# Altium PCB dc_cdi_pcb.PcbDoc (part 1 of 2)
Units mm, origin at the board's own origin, x right, y up, seen from the top; angles counter-clockwise.
Board outline 102.36 x 169.29 mm, 4 copper layers (Signal Top, Ground, Vcc, Signal Bottom), stack 0.603 mm thick; 125 components, 82 nets, 511 pads, 71 vias.
Unrouted connection lines stored in the file: 139.
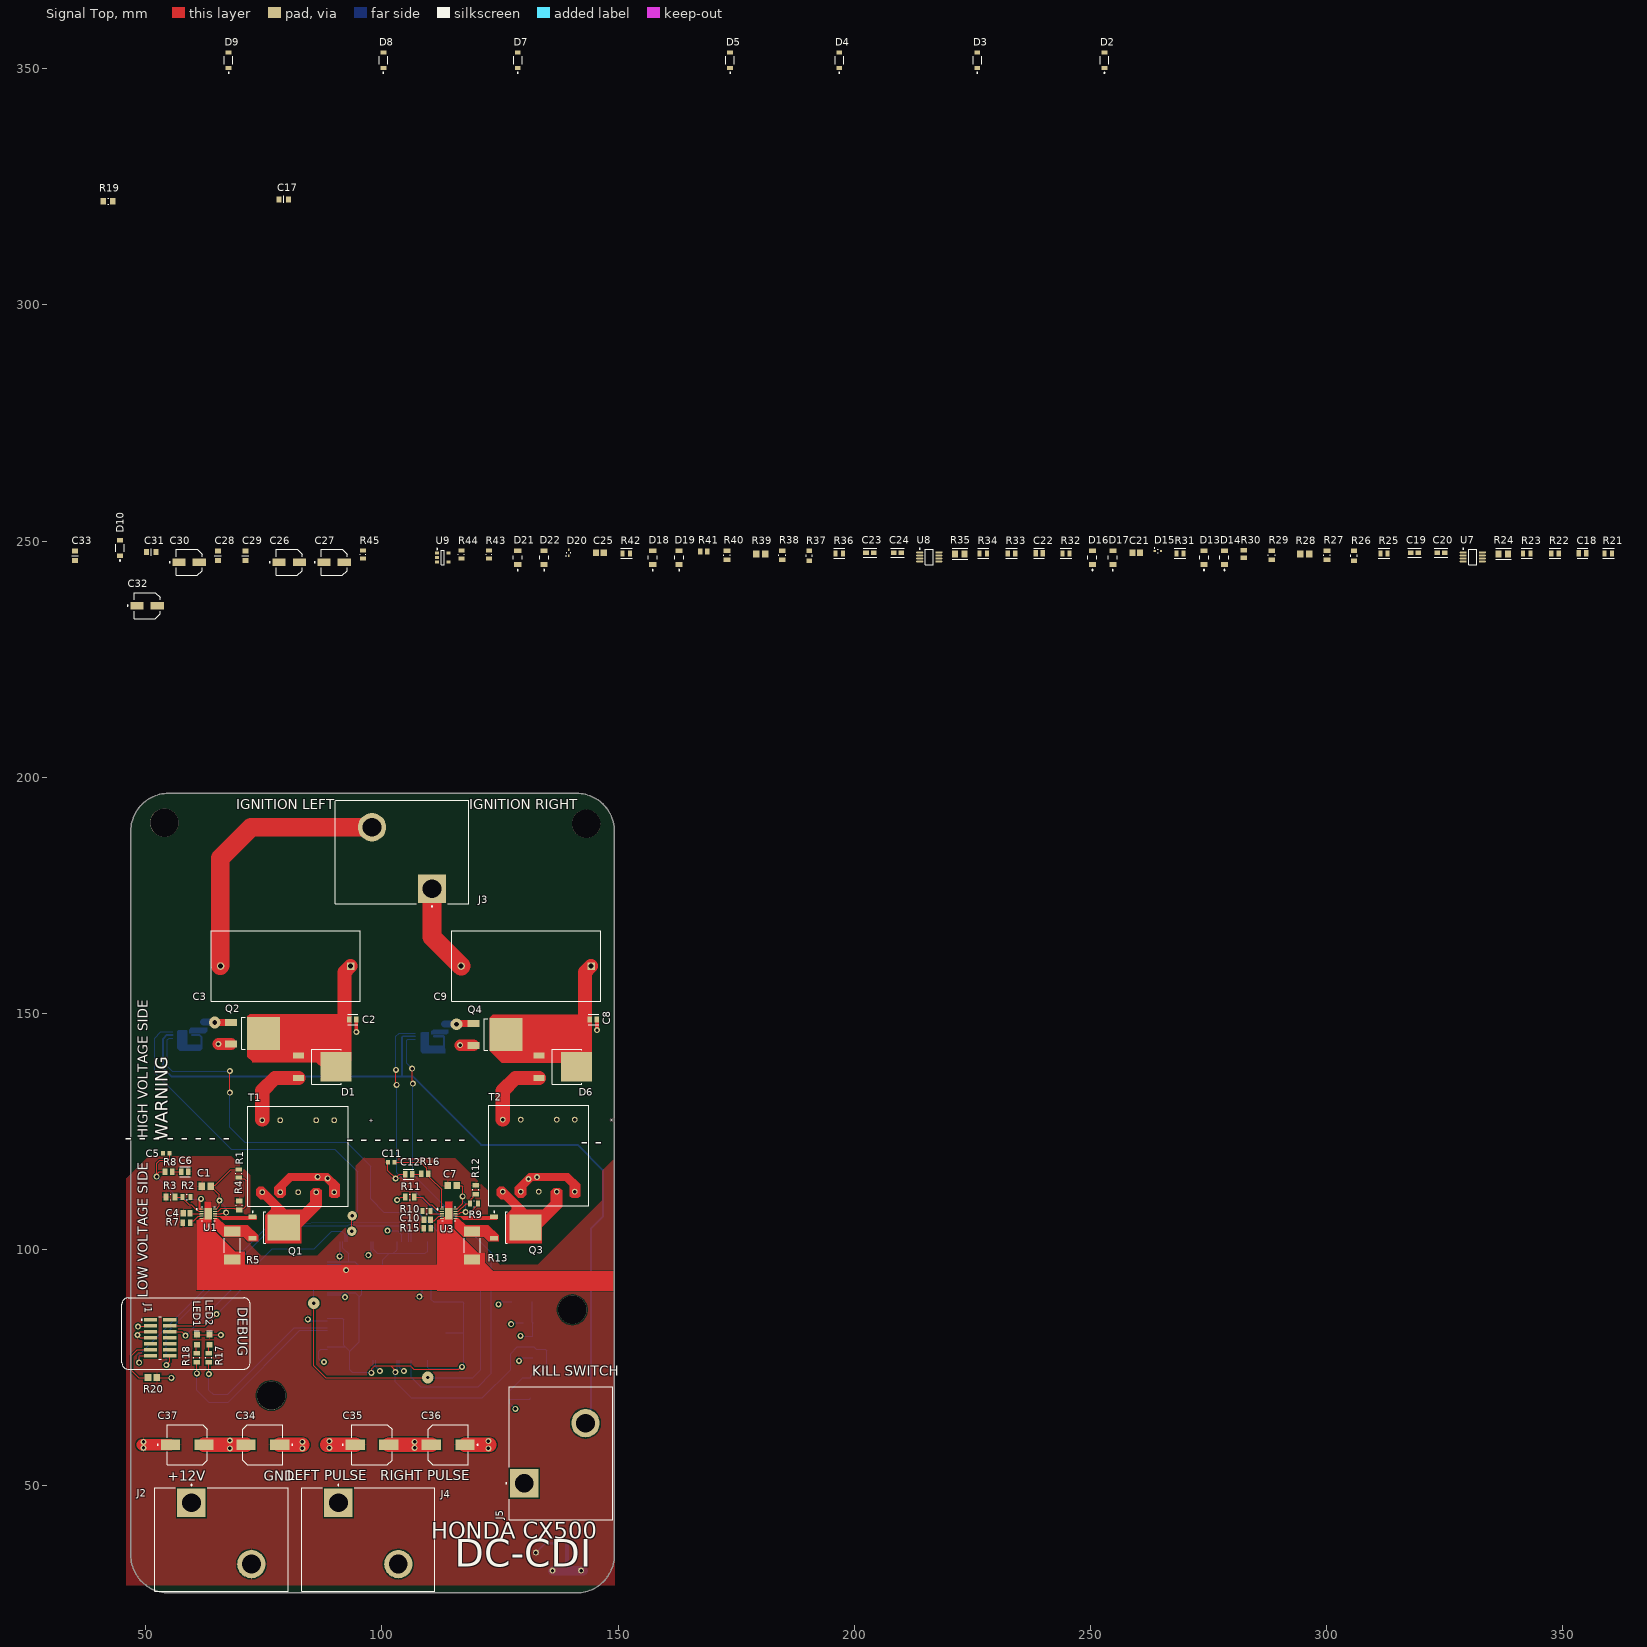
[diagram p0: Signal Top view]
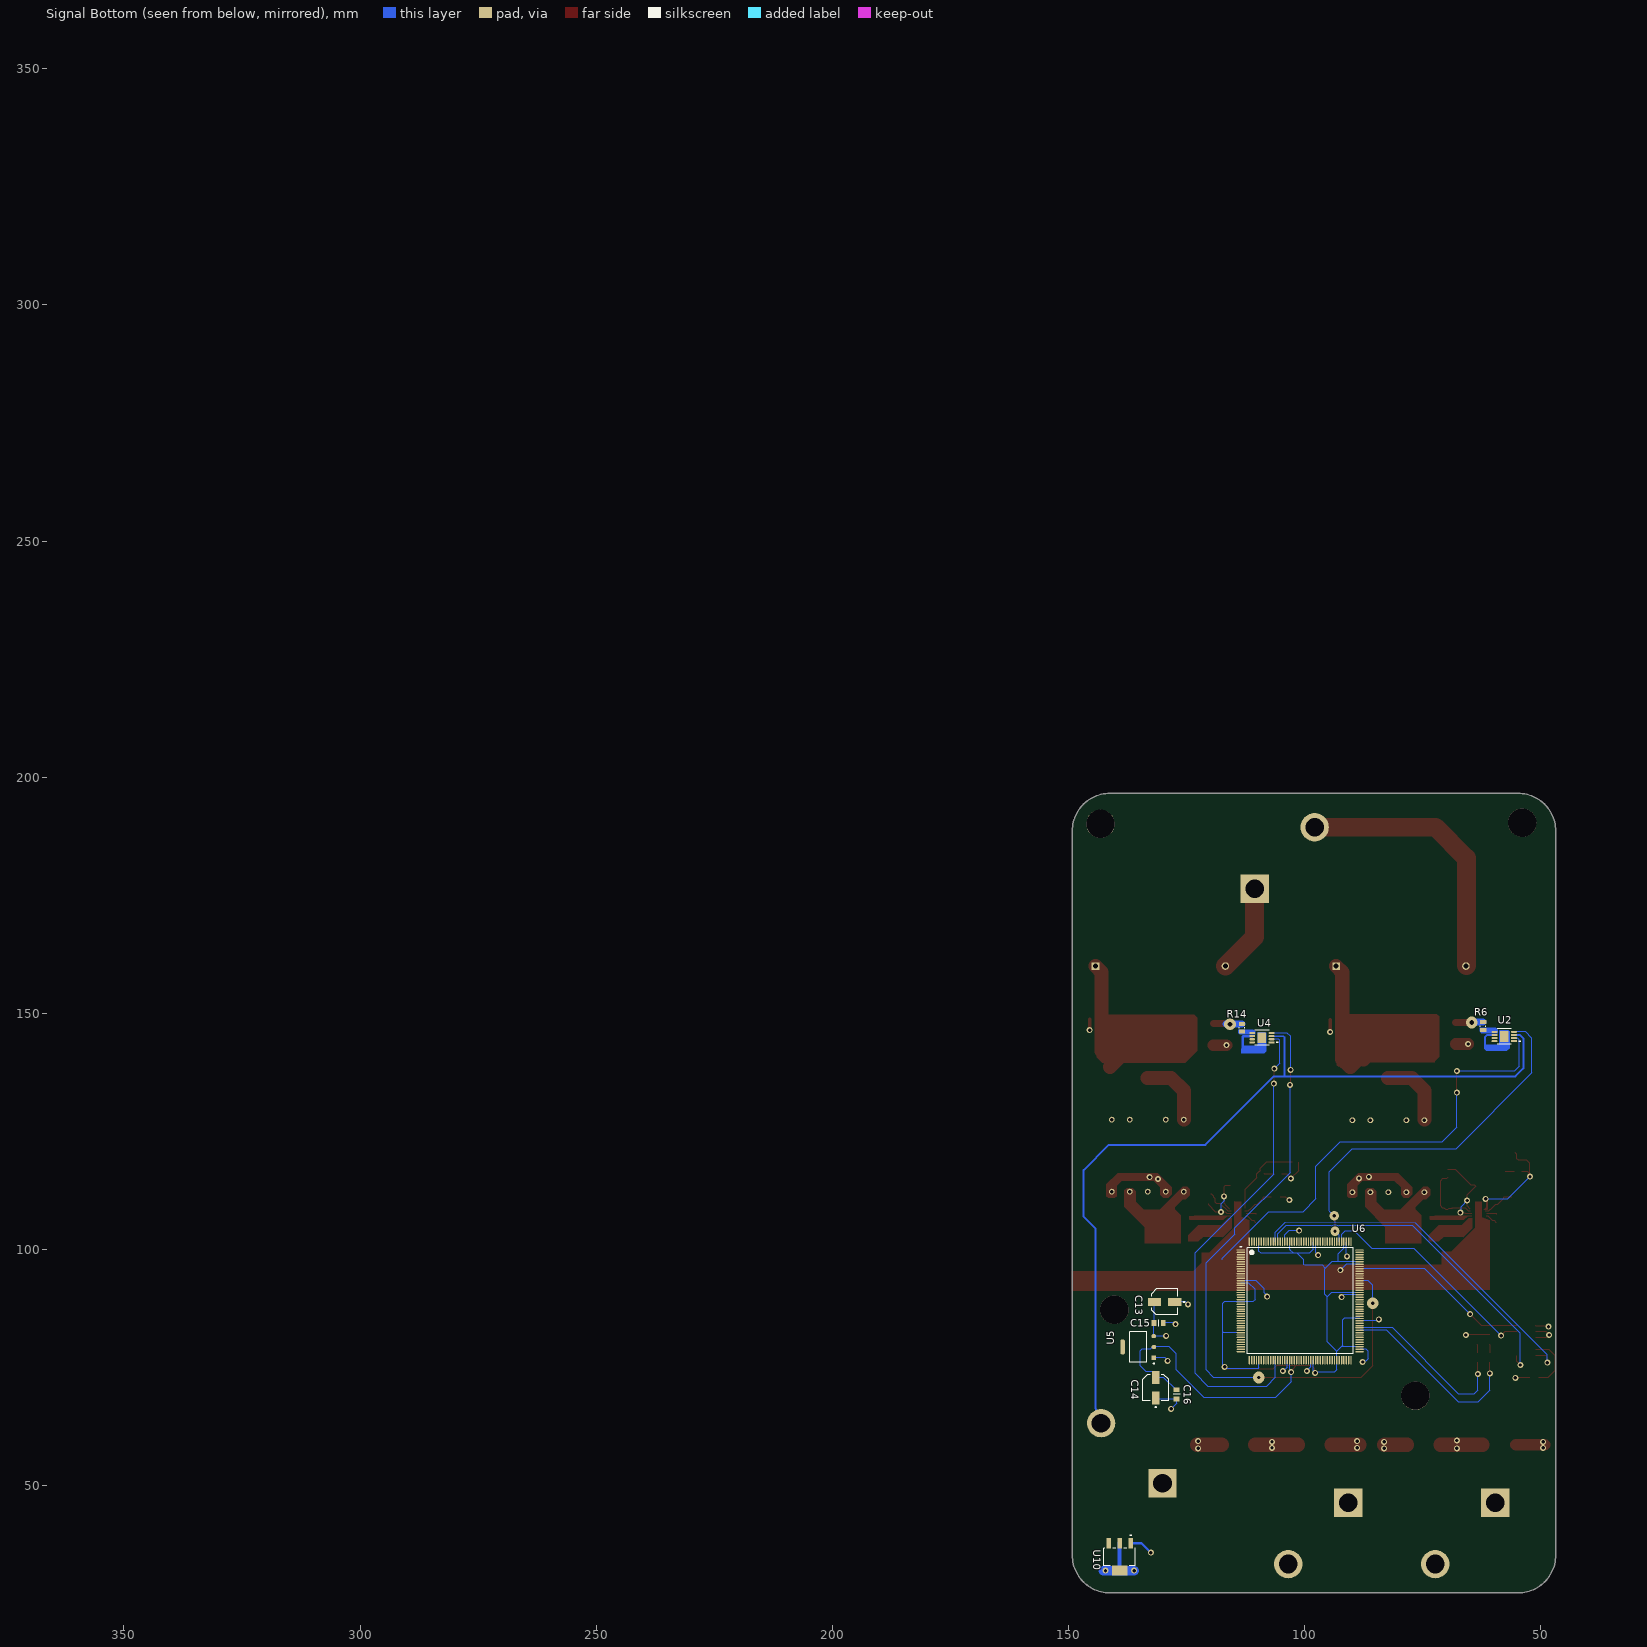
[diagram p1: Signal Bottom view, seen from below]
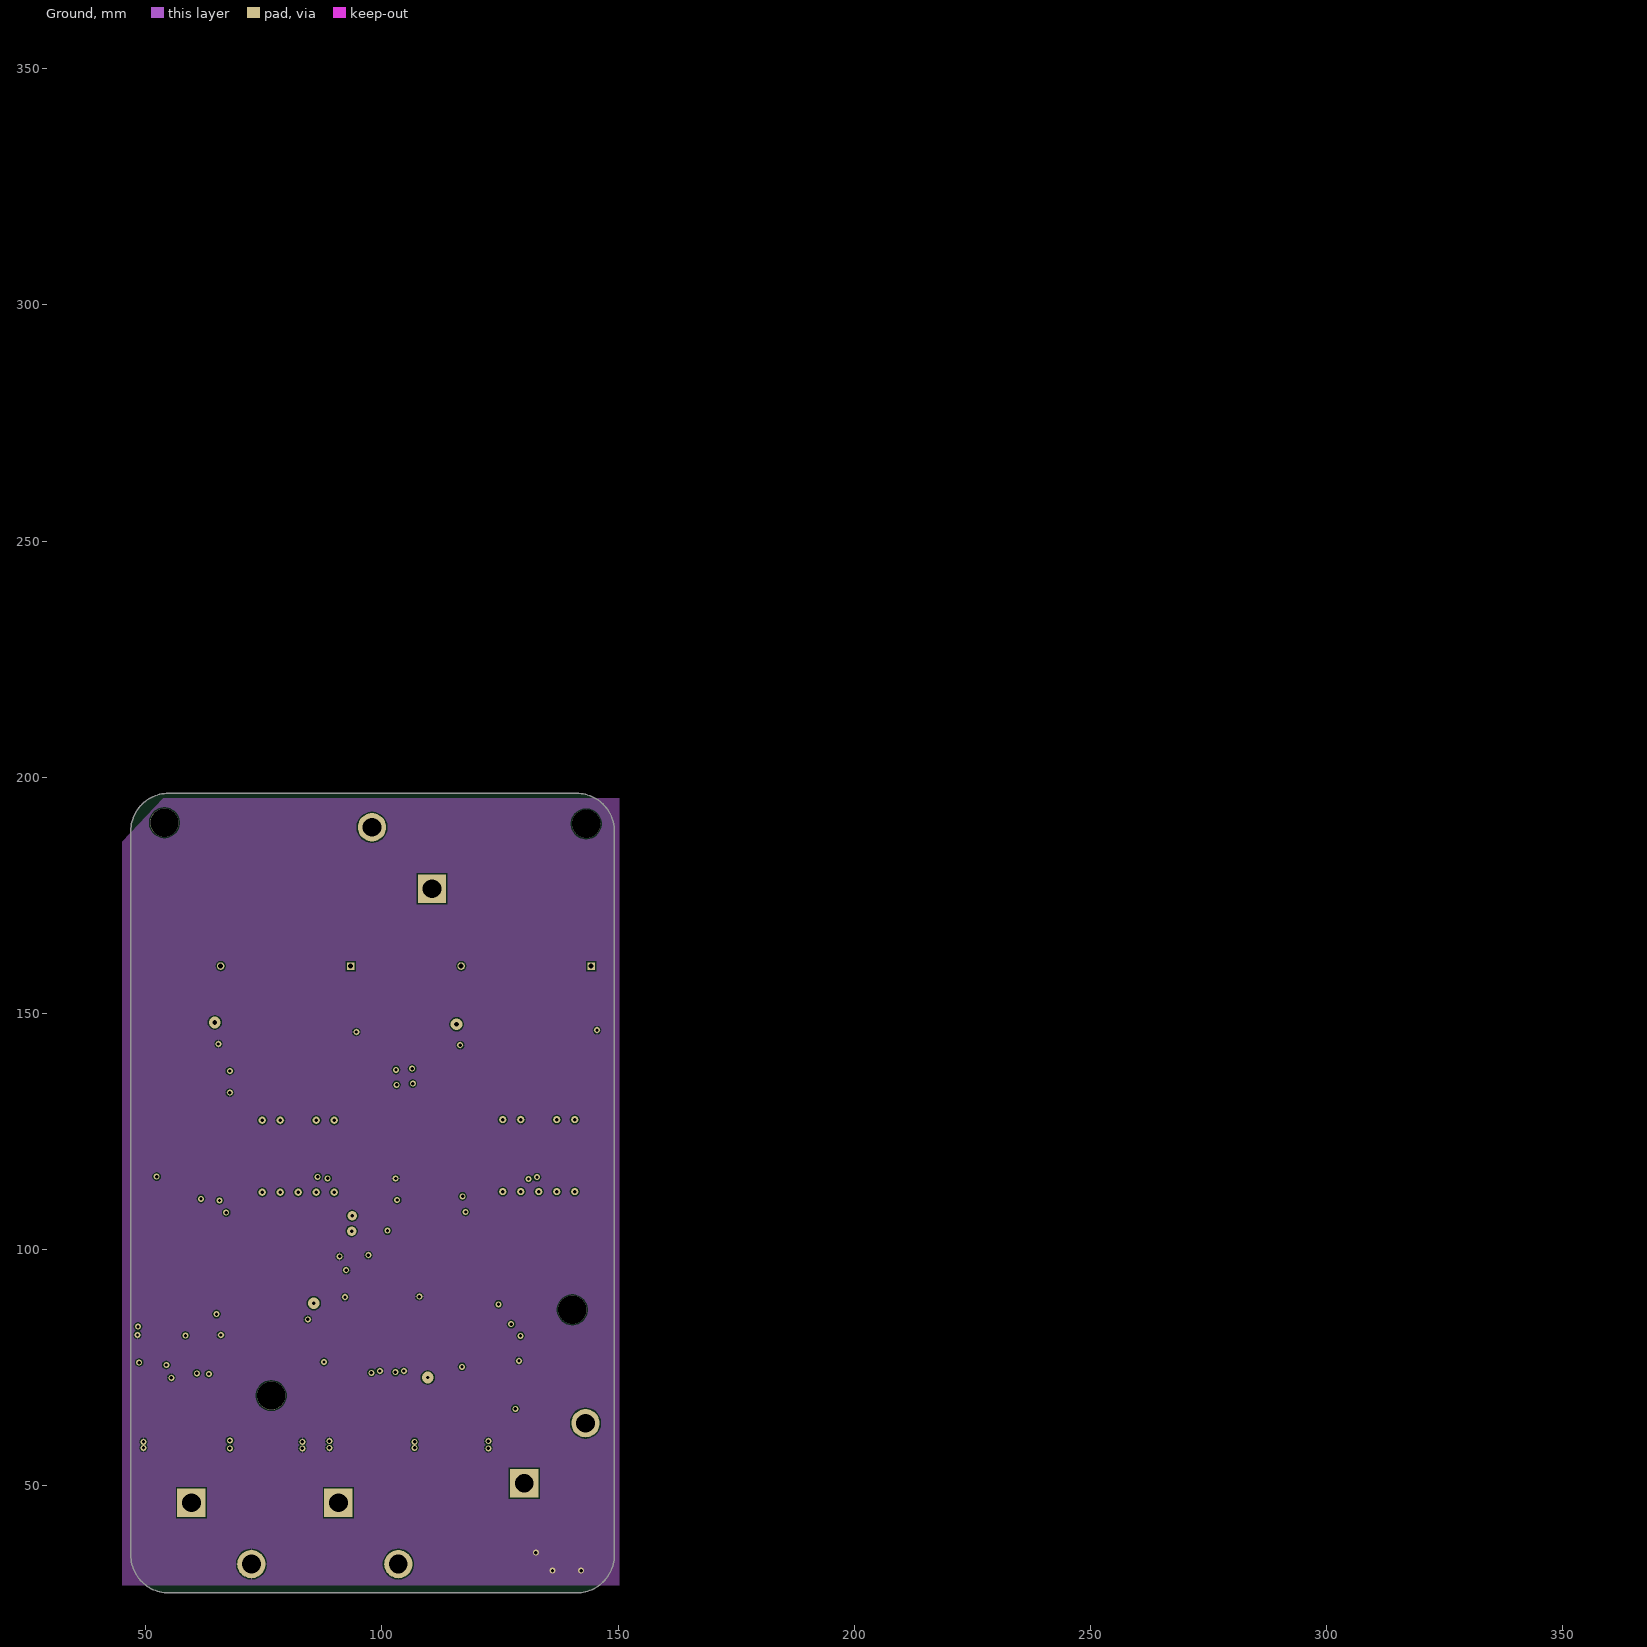
[diagram p2: Ground]
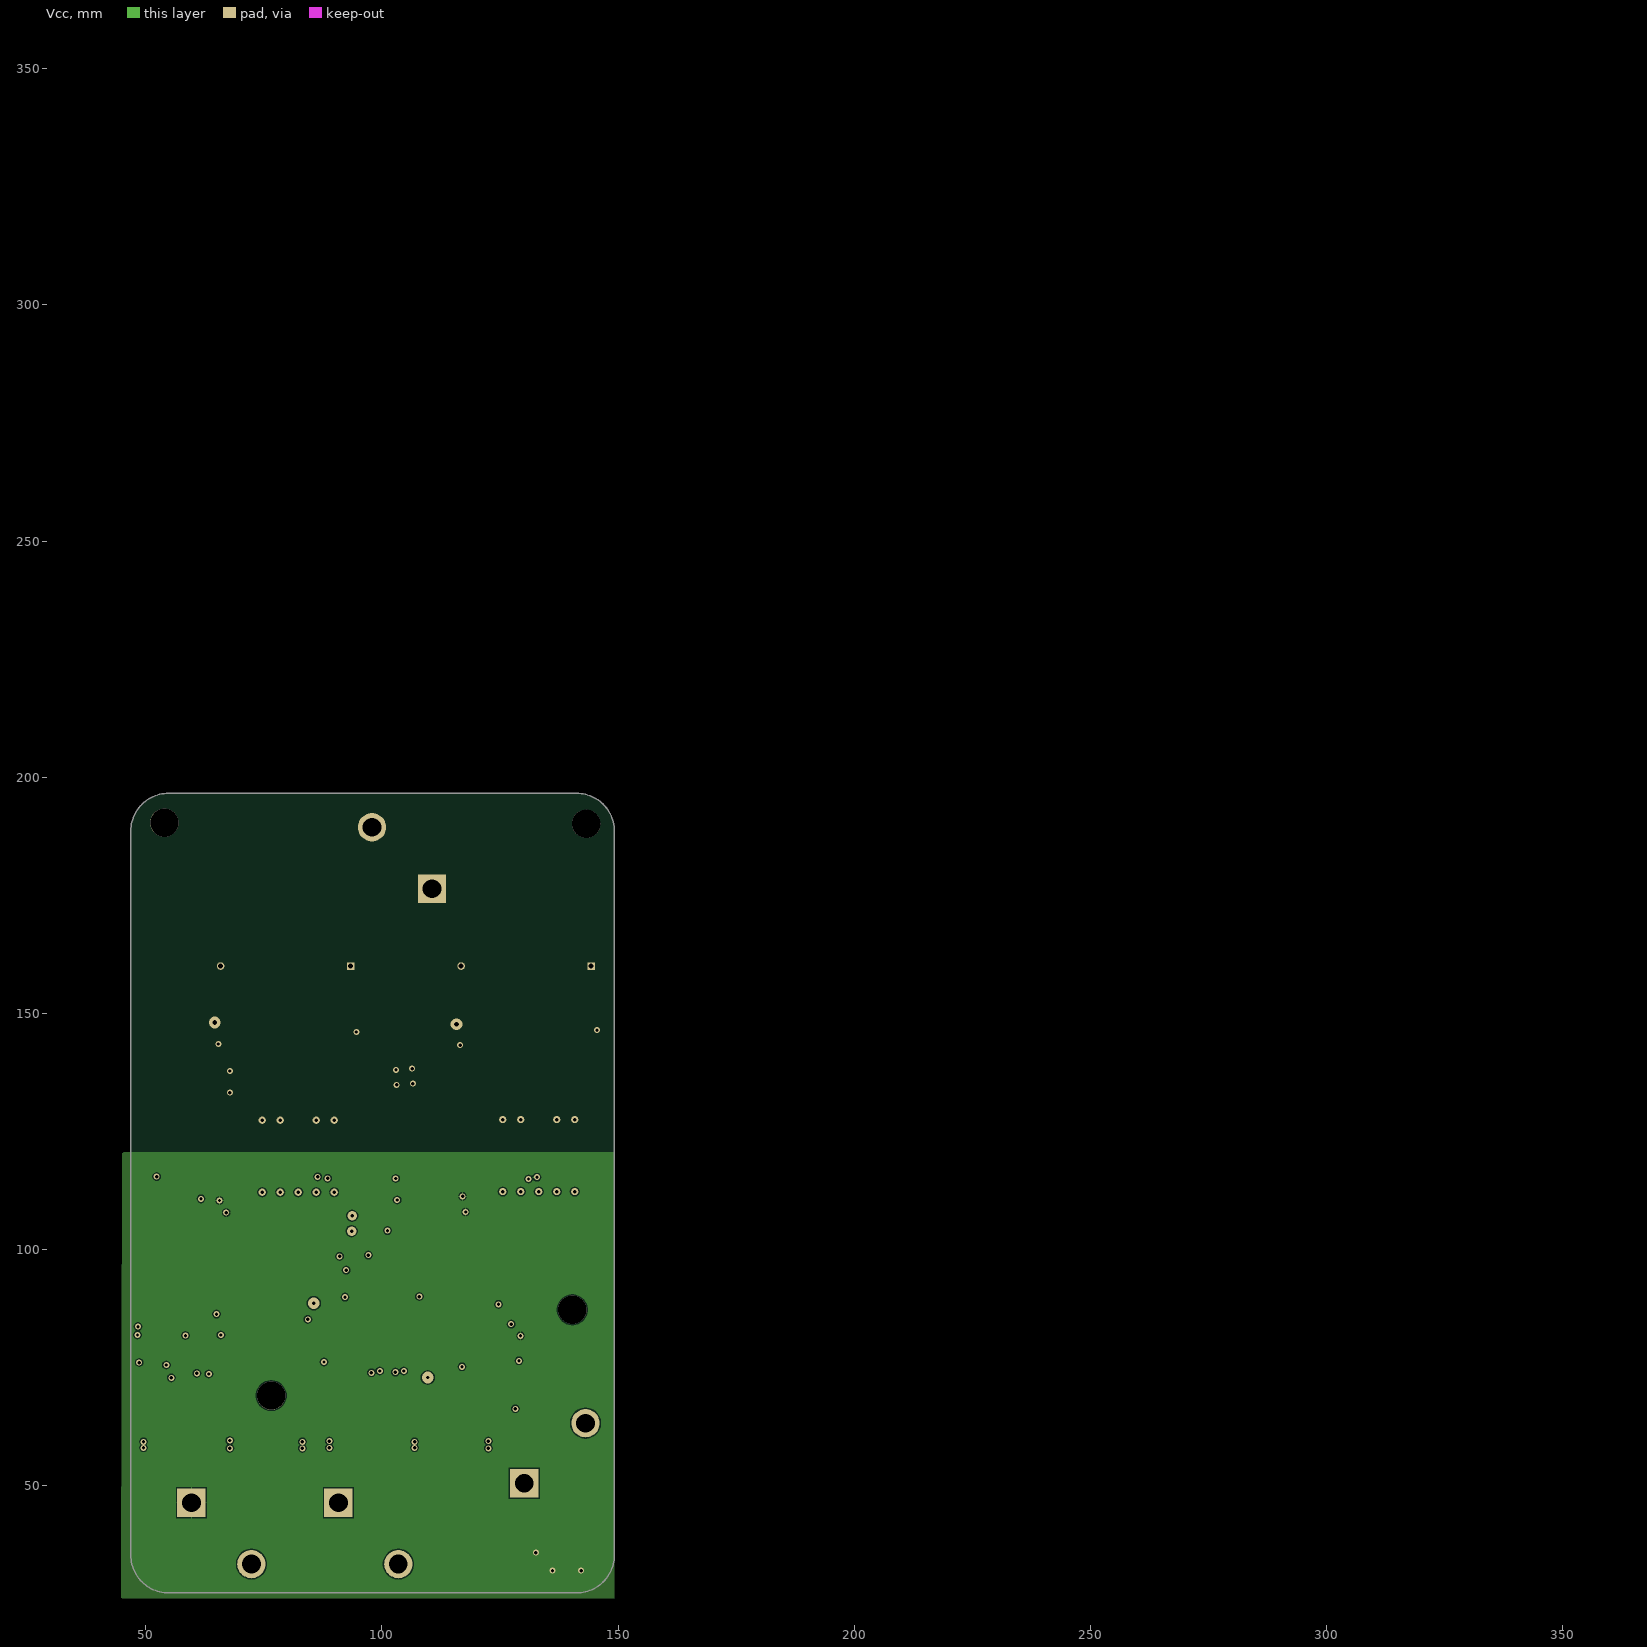
[diagram p3: Vcc]

## Layer stack, top to bottom
Top Solder: solder mask 0.0102, Solder Resist, Dk 3.5
Signal Top: signal copper 0.035
Dielectric 2: prepreg 0.0711, PP-006, Dk 4.1
Ground: signal copper 0.0356
Dielectric 1: dielectric 0.32, FR-4, Dk 4.8
Vcc: signal copper 0.0356
Dielectric 3: prepreg 0.0711, PP-006, Dk 4.1
Signal Bottom: signal copper 0.035
Bottom Solder: solder mask 0.0102, Solder Resist, Dk 3.5

## Board outline
46.863,35.305 46.863,188.596 cw(c54.863,188.596) 54.863,196.596 141.225,196.596 cw(c141.225,188.596) 149.225,188.596 149.225,35.305 cw(c141.225,35.305) 141.225,27.305 54.863,27.305 cw(c54.863,35.305)

## Design rules (kind name [scope] priority, off if disabled: settings)
AssemblyTestPointUsage [All] p1 off:
AssemblyTestpoint [All] p1 off: testpointundercomponent=TRUE minsize=1.016 maxsize=2.54 preferedsize=1.524 minholesize=0 maxholesize=1.016 preferedholesize=0.813 testpointgrid=0.025 usegrid=TRUE gridtolerance=0 allowsidetop=TRUE allowsidebottom=TRUE
Clearance Clearance_2 [InNamedPolygon('q3_1')] p1: gap=0 ignorepadtopadclearanceinfootprint=FALSE
Clearance Clearance_1 [InNamedPolygon('q3_1')] p2: gap=0 ignorepadtopadclearanceinfootprint=FALSE
Clearance [All] p3: gap=0.254 ignorepadtopadclearanceinfootprint=FALSE
ComponentClearance [All] p1 off: gap=0.254 collisioncheckmode=3 verticalgap=0.254 showdistances=FALSE
DiffPairsRouting [All] p1 off: maxlimit=0.254 minlimit=0.254 mostfreqgap=0.254 toplayer_minwidth=0.381 toplayer_maxwidth=0.381 toplayer_prefwidth=0.381 midlayer1_minwidth=0.381 midlayer1_maxwidth=0.381 midlayer1_prefwidth=0.381 midlayer2_minwidth=0.381 midlayer2_maxwidth=0.381 midlayer2_prefwidth=0.381 bottomlayer_minwidth=0.381 bottomlayer_maxwidth=0.381 bottomlayer_prefwidth=0.381 maxuncoupledlength=12.7
FabricationTestPointUsage [All] p1 off: valid=0 allowmultiple=FALSE
FabricationTestpoint [All] p1 off: side=3 testpointundercomponent=TRUE minsize=1.016 maxsize=2.54 preferedsize=1.524 minholesize=0 maxholesize=1.016 preferedholesize=0.813 testpointgrid=0.025 allowsidetop=TRUE allowsidebottom=TRUE usegrid=TRUE gridtolerance=0
FanoutControl Fanout_BGA [IsBGA] p1 off: bgadir=Out bgaviamode=Centered fanoutstyle=Auto fanoutdirection=Alternating viagrid=0.025 // Fanout_BGA (Default Rule)
FanoutControl Fanout_LCC [IsLCC] p2 off: bgadir=Out bgaviamode=Centered fanoutstyle=Auto fanoutdirection=Alternating viagrid=0.025 // Fanout_LCC (Default Rule)
FanoutControl Fanout_SOIC [IsSOIC] p3 off: bgadir=Out bgaviamode=Centered fanoutstyle=Auto fanoutdirection=Alternating viagrid=0.025 // Fanout_SOIC (Default Rule)
FanoutControl Fanout_Small [(CompPinCount < 5)] p4 off: bgadir=Out bgaviamode=Centered fanoutstyle=Auto fanoutdirection=OutThenIn viagrid=0.025 // Fanout_Small (Default Rule)
FanoutControl Fanout_Default [All] p5 off: bgadir=Out bgaviamode=Centered fanoutstyle=Auto fanoutdirection=Alternating viagrid=0.025 // Fanout_Default (Default Rule)
Height [All] p1 off: minheight=0 maxheight=25.4 prefheight=12.7
HoleSize [All] p1 off: absolutevalues=TRUE maxlimit=2.54 minlimit=0.025 maxpercent=80.000 minpercent=20.000
HoleToHoleClearance [All] p1 off: gap=0.254 allowstackedmicrovias=TRUE
LayerPairs [All] p1 off: enforce=TRUE
MinimumSolderMaskSliver [All] p1 off: minsoldermaskwidth=0.254
NetAntennae [All] p1 off: netantennaetolerance=0
PasteMaskExpansion [All] p1 off: expansion=0
PolygonConnect [All] p1: connectstyle=Relief reliefconductorwidth=0.254 reliefentries=4 polygonreliefangle="90 Angle" airgapwidth=0.254
RoutingCorners [All] p1 off: cornerstyle=45-Degree minsetback=2.54 maxsetback=2.54
RoutingLayers [All] p1 off: top layer_v5=TRUE mid layer 1_v5=TRUE mid layer 2_v5=TRUE bottom layer_v5=TRUE
RoutingPriority [All] p1 off: routingpriority=0
RoutingTopology [All] p1 off: topology=Shortest
RoutingVias [All] p1 off: holewidth=0.711 width=1.27 viastyle="Through Hole" minholewidth=0.711 minwidth=1.27 maxholewidth=0.711 maxwidth=1.27
SilkToSilkClearance [All] p1 off: silktosilkclearance=0.254
SilkToSolderMaskClearance [IsPad] p1 off: minsilkscreentomaskgap=0.254 clearancetoexposedcopper=TRUE
SolderMaskExpansion [All] p1 off: expansion=0.102 istentingtop=FALSE
SupplyNets "Schematic Supply Nets_2" [InNet('GND')] p1 off: voltage=0.000
SupplyNets "Schematic Supply Nets_1" [InNet('+3V3')] p2 off: voltage=0.000
SupplyNets "Schematic Supply Nets" [InNet('+5')] p3 off: voltage=0.000
Width [All] p1 off: maxlimit=0.254 minlimit=0.254 preferedwidth=0.254
6 further rules are at their usual default settings.

## Classes and differential pairs
component class power_side: C1 C2 C3 C4 C5 C6 C7 C8 C9 C10 C11 C12 D1 D2 D3 D4 D5 D6 D7 D8 D9 D10 Q1 Q2 Q3 Q4 R1 R2 R3 R4 R5 R6 R7 R8 R9 R10 R11 R12 R13 R14 R15 R16 T1 T2 U1 U2 U3 U4
component class logic: C13 C14 C15 C16 C17 J1 LED1 LED2 R17 R18 R19 R20 U5 U6
component class input_output: C34 C35 C36 C37 J2 J3 J4
component class input_filter: C18 C19 C20 C21 C22 C23 C24 C25 C26 C27 C28 C29 C30 C31 C32 C33 D13 D14 D15 D16 D17 D18 D19 D20 D21 D22 R21 R22 R23 R24 R25 R26 R27 R28 R29 R30 R31 R32 R33 R34 R35 R36 R37 R38 R39 R40 R41 R42 R43 R44 R45 U7 U8 U9 U10

## Components (designator, comment, footprint, x,y, rotation, side; value= is the part's Value field where it differs from the comment)
C1 "GRM21BR61C475KA88L" CAPC2013X135X45LL10T25 62.865,113.411 r0 top
C2 "C0805C224K1RACTU" FP-C0805C-DN-MFG 93.853,148.717 r0 top value="0.22 μF"
C3 "BFC233820225" FP-BFC233820225-MFG 79.629,160.02 r180 top
C4 "C0805C105K3RACTU" CAPC2013X140X50LL20T25 58.674,107.696 r0 top
C5 "GRM1885C1H101JA01D" CAPC1608X90X35NL10T15 54.356,120.396 r0 top
C6 "C0805C103K2RACTU" FP-C0805C-DN-MFG 58.293,116.459 r0 top value="10,000 pF"
C7 "GRM21BR61C475KA88L" CAPC2013X135X45LL10T25 114.874,113.538 r0 top
C8 "C0805C224K1RACTU" FP-C0805C-DN-MFG 144.78,148.717 r0 top value="0.22 μF"
C9 "BFC233820225" FP-BFC233820225-MFG 130.556,160.02 r180 top
C10 "C0805C105K3RACTU" CAPC2013X140X50LL20T25 109.601,106.344 r0 top
C11 "GRM1885C1H101JA01D" CAPC1608X90X35NL10T15 101.981,118.491 r0 top
C12 "C0805C103K2RACTU" FP-C0805C-DN-MFG 105.664,115.951 r180 top value="10,000 pF"
C13 "EEE1VA100SR" FP-SC-MFG 129.667,88.9 r0 bottom
C14 "EEE1VA100SR" FP-SC-MFG 131.572,70.748 r90 bottom
C15 "08055G104ZAT2A" FP-0805-L_2_01_0_2-W_1_25-MFG 130.937,84.455 r180 bottom
C16 "08055G104ZAT2A" FP-0805-L_2_01_0_2-W_1_25-MFG 127.127,69.342 r270 bottom
C17 "08055G104ZAT2A" FP-0805-L_2_01_0_2-W_1_25-MFG 79.248,322.326 r0 top
C18 "C0805C822G2GACTU" FP-C0805C-DN-MFG 354.203,247.396 r0 top value="8,200 pF"
C19 "GRM188R60J106ME47D" FP-GRM188-0_1-e0_2_0_55-IPC_A 318.643,247.523 r0 top
C20 "GRM188R60J106ME47D" FP-GRM188-0_1-e0_2_0_55-IPC_A 324.231,247.523 r0 top
C21 "08051A220J4T2A" CAPC2013X140X50NL20T25 259.715,247.523 r0 top
C22 "C0805C822G2GACTU" FP-C0805C-DN-MFG 239.141,247.396 r0 top value="8,200 pF"
C23 "GRM188R60J106ME47D" FP-GRM188-0_1-e0_2_0_55-IPC_A 203.327,247.523 r0 top
C24 "GRM188R60J106ME47D" FP-GRM188-0_1-e0_2_0_55-IPC_A 209.169,247.523 r0 top
C25 "08051A220J4T2A" CAPC2013X140X50NL20T25 146.177,247.523 r0 top
C26 "EEE1VA100SR" FP-SC-MFG 80.391,245.491 r0 top
C27 "EEE1VA100SR" FP-SC-MFG 89.916,245.491 r0 top
C28 "08055G104ZAT2A" FP-0805-L_2_01_0_2-W_1_25-MFG 65.278,246.888 r90 top
C29 "08055G104ZAT2A" FP-0805-L_2_01_0_2-W_1_25-MFG 71.12,246.888 r90 top
C30 "EEE1VA100SR" FP-SC-MFG 59.182,245.491 r0 top
C31 "08055G104ZAT2A" FP-0805-L_2_01_0_2-W_1_25-MFG 51.181,247.65 r0 top
C32 "EEE1VA100SR" FP-SC-MFG 50.292,236.347 r0 top
C33 "08055G104ZAT2A" FP-0805-L_2_01_0_2-W_1_25-MFG 35.052,246.888 r90 top
C34 "50SGV100M8X10.5" FP-SGV8X10_5-MFG 74.803,58.674 r180 top
C35 "50SGV100M8X10.5" FP-SGV8X10_5-MFG 97.917,58.674 r0 top
C36 "50SGV100M8X10.5" FP-SGV8X10_5-MFG 114.046,58.674 r180 top
C37 "50SGV100M8X10.5" FP-SGV8X10_5-MFG 58.801,58.674 r0 top
D1 "C3D03060E" FP-TO-252-2_v2-MFG 88.265,138.684 r270 top
D2 "MBR0540" FP-425-04-MFG 252.984,351.79 r90 top
D3 "MBR0540" FP-425-04-MFG 226.06,351.79 r90 top
D4 "MBR0540" FP-425-04-MFG 196.85,351.79 r90 top
D5 "MBR0540" FP-425-04-MFG 173.736,351.79 r90 top
D6 "C3D03060E" FP-TO-252-2_v2-MFG 139.192,138.684 r270 top
D7 "MBR0540" FP-425-04-MFG 128.778,351.79 r90 top
D8 "MBR0540" FP-425-04-MFG 100.33,351.79 r90 top
D9 "MBR0540" FP-425-04-MFG 67.564,351.79 r90 top
D10 "MBR0540" FP-425-04-MFG 44.577,248.539 r90 top
D13 "1N5819HW1-7-F" FP-SOD123F_Type_B-MFG 274.066,246.507 r90 top value=30pF
D14 "1N5819HW1-7-F" FP-SOD123F_Type_B-MFG 278.384,246.507 r90 top value=30pF
D15 "MM5Z2V4ST1G" ONSC-SOD-523-2-502-01_V 264.287,247.904 r0 top
D16 "1N5819HW1-7-F" FP-SOD123F_Type_B-MFG 250.444,246.507 r90 top value=30pF
D17 "1N5819HW1-7-F" FP-SOD123F_Type_B-MFG 254.762,246.507 r90 top value=30pF
D18 "1N5819HW1-7-F" FP-SOD123F_Type_B-MFG 157.353,246.507 r90 top value=30pF
D19 "1N5819HW1-7-F" FP-SOD123F_Type_B-MFG 162.941,246.507 r90 top value=30pF
D20 "MM5Z2V4ST1G" ONSC-SOD-523-2-502-01_V 139.573,247.523 r90 top
D21 "1N5819HW1-7-F" FP-SOD123F_Type_B-MFG 128.778,246.507 r90 top value=30pF
D22 "1N5819HW1-7-F" FP-SOD123F_Type_B-MFG 134.366,246.507 r90 top value=30pF
J1 "FTSH-107-01-L-DV-K" FP-FTSH-107-01-L-DV-K-MFG 53.083,81.28 r270 top
J2 "38969-0002" FP-38969-0002-MFG 66.04,38.608 r0 top
J3 "38969-0002" FP-38969-0002-MFG 104.267,184.203 r180 top
J4 "38969-0002" FP-38969-0002-MFG 97.155,38.608 r0 top
J5 "38969-0002" FP-38969-0002-MFG 137.922,56.896 r90 top (schematic designator J4)
LED1 "150080SS75000" WL-SMCW_0805_150080xx75000 60.833,80.899 r270 top (schematic designator D12)
LED2 "150080SS75000" WL-SMCW_0805_150080xx75000 63.5,80.899 r270 top (schematic designator D11)
Q1 "IPD035N06L3 G" INF-PG-TO252-3-11_A_L 77.244,104.652 r0 top
Q2 "IPD600N25N3" FP-PG-TO252-3-MFG 72.647,145.782 r270 top
Q3 "IPD035N06L3 G" INF-PG-TO252-3-11_A_L 128.397,104.648 r0 top
Q4 "IPD600N25N3" FP-PG-TO252-3-MFG 123.952,145.542 r270 top
R1 "CRCW0805470KFKEA" FP-CRCW0805-e3-IPC_C 69.723,116.078 r90 top
R2 "CRCW0805820KFKEA" RESC2013X50X30LL20T20 58.674,111.125 r0 top
R3 "CRCW08054K70FKEA" FP-CRCW0805-e3-IPC_B 55.245,111.125 r0 top
R4 "CRCW080556K0FKEA" FP-CRCW0805-e3-IPC_B 69.85,109.347 r270 top
R5 "CSRF2512FT15L0" FP-CSRF2512-MFG 68.326,100.838 r90 top
R6 "CRCW0805820KFKEA" RESC2013X50X30LL20T20 62.23,147.32 r270 bottom
R7 "ERJ6ENF1203V" RESC2013X70X40LL20T20 58.674,105.664 r0 top
R8 "ERA6AEB183V" RESC2013X60X40LL20T25 54.864,116.459 r180 top
R9 "CRCW0805470KFKEA" FP-CRCW0805-e3-IPC_C 119.507,109.728 r0 top
R10 "CRCW0805820KFKEA" RESC2013X50X30LL20T20 109.474,108.151 r0 top
R11 "CRCW08054K70FKEA" FP-CRCW0805-e3-IPC_B 105.918,111.125 r0 top
R12 "CRCW080556K0FKEA" FP-CRCW0805-e3-IPC_B 119.888,112.649 r270 top
R13 "CSRF2512FT15L0" FP-CSRF2512-MFG 119.126,100.838 r90 top
R14 "CRCW0805820KFKEA" RESC2013X50X30LL20T20 113.284,146.939 r270 bottom
R15 "ERJ6ENF1203V" RESC2013X70X40LL20T20 109.601,104.536 r0 top
R16 "ERA6AEB183V" RESC2013X60X40LL20T25 109.093,116.078 r0 top
R17 "CRCW0805510RFKEA" FP-CRCW0805-e3-IPC_B 63.373,77.089 r90 top
R18 "CRCW0805510RFKEA" FP-CRCW0805-e3-IPC_B 60.833,77.089 r90 top
R19 "RC0805JR-0710KL" RESC2013X60X35ML10T20 42.037,321.945 r0 top
R20 "ERA6AEB101V" RESC2013X60X40ML20T25 51.435,72.898 r180 top
R21 "MCR10EZPJ824" FP-MCR10-IPC_C 359.664,247.396 r0 top
R22 "RMCF0805JT150K" FP-RMCF0805-IPC_C 348.361,247.396 r0 top
R23 "MCR10EZHJ225" FP-MCR10-IPC_C 342.392,247.396 r0 top
R24 "RC2012J683CS" FP-RC2012-IPC_A 337.439,247.269 r0 top
R25 "MCR10EZHJ225" FP-MCR10-IPC_C 312.166,247.396 r0 top
R26 "RT0805DRE0712KL" FP-RT0805-MFG 305.816,246.888 r90 top value=12KΩ
R27 "CRCW080522K0FKEA" Vishay_CRCW0805-e3_MFG 300.101,247.015 r90 top
R28 "ERJ-6GEYJ101V" RESC2013X70X40ML20T20 295.402,247.269 r0 top
R29 "CRCW080510M0FKEB" FP-CRCW0805-e3-MFG 288.417,247.015 r90 top
R30 "ERJ-6GEYJ103V" RESC2013X70X40LL20T20 282.448,247.269 r90 top
R31 "MCR10EZHJ225" FP-MCR10-IPC_C 268.986,247.396 r0 top
R32 "MCR10EZPJ824" FP-MCR10-IPC_C 244.856,247.396 r0 top
R33 "RMCF0805JT150K" FP-RMCF0805-IPC_C 233.299,247.396 r0 top
R34 "MCR10EZHJ225" FP-MCR10-IPC_C 227.33,247.396 r0 top
R35 "RC2012J683CS" FP-RC2012-IPC_A 222.377,247.269 r0 top
R36 "MCR10EZHJ225" FP-MCR10-IPC_C 196.85,247.396 r0 top
R37 "RT0805DRE0712KL" FP-RT0805-MFG 190.5,246.888 r90 top value=12KΩ
R38 "CRCW080522K0FKEA" Vishay_CRCW0805-e3_MFG 184.785,247.015 r90 top
R39 "ERJ-6GEYJ101V" RESC2013X70X40ML20T20 180.213,247.269 r0 top
R40 "CRCW080510M0FKEB" FP-CRCW0805-e3-MFG 173.101,247.015 r90 top
R41 "ERJ-6GEYJ103V" RESC2013X70X40LL20T20 168.148,247.777 r0 top
R42 "MCR10EZHJ225" FP-MCR10-IPC_C 151.765,247.396 r0 top
R43 "CRCW080510K0JNEA" FP-CRCW0805-e3-IPC_C 122.682,247.142 r90 top
R44 "CRCW080510K0JNEA" FP-CRCW0805-e3-IPC_C 116.84,247.142 r90 top
R45 "CRCW080510K0JNEA" FP-CRCW0805-e3-IPC_C 96.012,247.142 r90 top
T1 "74087" T_DIP09_74087_21X21_MYR 89.916,127.381 r270 top
T2 "74087" T_DIP09_74087_21X21_MYR 140.843,127.508 r270 top
U1 "LT3758EDD#PBF" FP-DD-10-05-08-1699-IPC_B 63.246,107.569 r0 top
U2 "ADP3654ARHZ-RL" FP-RH-8-1-IPC_C 57.766,145.105 r0 bottom
U3 "LT3758EDD#PBF" FP-DD-10-05-08-1699-IPC_B 114.173,107.569 r0 top
U4 "ADP3654ARHZ-RL" FP-RH-8-1-IPC_C 109.074,144.851 r0 bottom
U5 "AMS1117-3.3" FP-AMS1117-IPC_C 135.255,79.375 r0 bottom
U6 "STM32F429IIT6" STM-LQFP176_N 100.965,89.154 r180 bottom
U7 "ADA4051-2ARMZ" ADI-RM-8_L 330.962,246.634 r0 top
U8 "ADA4051-2ARMZ" ADI-RM-8_L 215.9,246.634 r0 top
U9 "AD8031ARTZ-REEL7" ADI-RJ-5_L 112.903,246.507 r0 top
U10 "LM7805MP/NOPB" FP-DCY0004A-MFG 139.192,34.925 r270 bottom

## Footprints (in the part's own frame and the unit in brackets; to place one, negate y for a bottom-side part, rotate by r counter-clockwise, add the part's x,y. Pads: shape width x height; smd on the part's side, far side on the other; paste and mask are expansions set on the pad)
ADI-RJ-5_L [mm] "SOT-23, 5-Leads, Body 2.9x1.6mm, Pitch 0.95mm, IPC High Density"
  rect 0.9x0.6 smd: 1(-1.2,0.95) 2(-1.2,0) 3(-1.2,-0.95) 4(1.2,-0.95) 5(1.2,0.95)
  silkscreen extent -1.32,-1.5 0.35,1.92, body extent -0.85,-1.5 0.85,1.5, height 1.45
ADI-RM-8_L [mm] "SOP, 8-Leads, Body 3x3mm, Pitch 0.65mm, IPC High Density"
  oval 1.5x0.45 smd: 1(-2.025,0.975) 2(-2.025,0.325) 3(-2.025,-0.325) 4(-2.025,-0.975) 5(2.025,-0.975) 6(2.025,-0.325) 7(2.025,0.325) 8(2.025,0.975)
  silkscreen extent -2.15,-1.6 0.87,1.87, body extent -1.6,-1.6 1.6,1.6, height 1.1
CAPC1608X90X35NL10T15 [mm] "Chip Capacitor, 2-Leads, Body 1.60x0.80mm, IPC Medium Density"
  rect 0.85x0.95 smd: 1(-0.675,0) 2(0.675,0)
  body extent -0.85,-0.45 0.85,0.45, height 0.9
CAPC2013X135X45LL10T25 [mm] "Chip Capacitor, 2-Leads, Body 2.10x1.35mm, IPC High Density"
  rect 1.4x1.5 smd: 1(-0.95,0) 2(0.95,0)
  body extent -1.05,-0.67 1.05,0.67, height 1.35
CAPC2013X140X50LL20T25 [mm] "Chip Capacitor, 2-Leads, Body 2.00x1.25mm, IPC High Density"
  rect 1.1x1.35 smd: 1(-0.7,0) 2(0.7,0)
  body extent -1.1,-0.72 1.1,0.72, height 1.4
CAPC2013X140X50NL20T25 [mm] "Chip Capacitor, 2-Leads, Body 2.00x1.25mm, IPC Medium Density"
  rect 1.3x1.45 smd: 1(-0.8,0) 2(0.8,0)
  body extent -1.1,-0.72 1.1,0.72, height 1.4
FP-425-04-MFG [mil]
  rect 36x48 smd paste+0 mask+0: 1(-64.5,0) 2(64.5,0)
  silkscreen extent -110,-35 32,35, body extent -86,-39 86,39, height 10
FP-0805-L_2_01_0_2-W_1_25-MFG [mm]
  rect 1x1.25 smd paste+0 mask+0: 1(-1,0) 2(1,0)
  silkscreen extent 0,-0.73 0,0.73, body extent -1,-0.63 1,0.63, height 1.02
FP-38969-0002-MFG [mm]
  rect 6.01x6.01 hole 3.96 paste-2539.97 mask+0: 1(-6.35,7.8)
  round 6.01 hole 3.96 paste-2539.97 mask+0: 2(6.35,-5.2)
  silkscreen extent -14.1,-10.95 14.1,11.67, body extent -14.2,-11.05 14.2,11.05, height 0.25
FP-AMS1117-IPC_C [mm]
  rect 1.004x0.872 smd paste+0 mask+0: 1(-3.295,2.29)
  rrect100% 1.004x0.872 smd paste+0 mask+0: 2(-3.295,0) 3(-3.295,-2.29)
  rrect87% 1.004x3.182 smd paste+0 mask+0: 4(3.295,0)
  silkscreen extent -3.42,-3.25 1.75,3.62, body extent -3.53,-3.25 3.53,3.25, height 1.8
FP-BFC233820225-MFG [mm]
  rect 1.6x1.6 hole 1.05 paste-2539.97 mask+0: 1(-13.75,0)
  round 1.6 hole 1.05 paste-2539.97 mask+0: 2(13.75,0)
  silkscreen extent -15.75,-7.5 15.75,7.5, body extent -15.85,-7.6 15.85,7.6, height 0.25
FP-C0805C-DN-MFG [mm]
  rect 0.95x1.35 smd paste+0 mask+0: 1(-0.75,0) 2(0.75,0)
  silkscreen extent -1.1,-1.07 1.1,1.07, body extent -1.4,-0.85 1.4,0.85, height 0.25
FP-CRCW0805-e3-IPC_B [mm]
  rect 1.007x1.408 smd paste+0 mask+0: 1(-0.951,0) 2(0.951,0)
  silkscreen extent -0.07,-0.62 0.07,0.62, body extent -1.7,-0.95 1.7,0.95, height 0.25
FP-CRCW0805-e3-IPC_C [mm]
  rect 0.807x1.308 smd paste+0 mask+0: 1(-0.851,0) 2(0.851,0)
  silkscreen extent -0.07,-0.62 0.07,0.62, body extent -1.35,-0.8 1.35,0.8, height 0.25
FP-CRCW0805-e3-MFG [mm]
  rect 0.95x1.45 smd paste+0 mask+0: 1(-0.975,0) 2(0.975,0)
  silkscreen extent -0.13,-0.7 0.13,0.7, body extent -1.55,-0.82 1.55,0.82, height 0.25
FP-CSRF2512-MFG [mm]
  rect 2.1x3.4 smd paste+0 mask+0: 1(-2.95,0) 2(2.95,0)
  silkscreen extent -1.53,-1.73 1.53,1.73, body extent -4.1,-1.83 4.1,1.83, height 0.25
FP-DCY0004A-MFG [mm]
  rect 2.15x0.95 smd paste+0 mask+0: 1(-2.9,2.3) 2(-2.9,0) 3(-2.9,-2.3)
  rect 2.15x3.25 smd paste+0 mask+0: 4(2.9,0)
  silkscreen extent -4.7,-3.35 1.85,3.35, body extent -3.5,-3.25 3.5,3.25, height 1.8
FP-DD-10-05-08-1699-IPC_B [mm]
  rect 0.881x0.242 smd paste+0 mask+0: 1(-1.416,1)
  rrect100% 0.881x0.242 smd paste+0 mask+0: 2(-1.416,0.5) 3(-1.416,0) 4(-1.416,-0.5) 5(-1.416,-1) 6(1.416,-1) 7(1.416,-0.5) 8(1.416,0) 9(1.416,0.5) 10(1.416,1)
  rect 1.65x2.48 smd paste-1000 mask+0: 11(0,0)
  silkscreen extent -2.53,-1.5 1.5,1.5, body extent -2.11,-1.75 2.11,1.75, height 0.25
FP-FTSH-107-01-L-DV-K-MFG [mm]
  rect 0.74x2.79 smd paste+0 mask+0: 1(-3.81,-2.035) 2(-3.81,2.035) 3(-2.54,-2.035) 4(-2.54,2.035) 5(-1.27,-2.035) 6(-1.27,2.035) 7(0,-2.035) 8(0,2.035) 9(1.27,-2.035) 10(1.27,2.035) 11(2.54,-2.035) 12(2.54,2.035) 13(3.81,-2.035) 14(3.81,2.035)
  silkscreen extent -4.51,-4.04 4.51,0.27, body extent -4.45,-2.92 4.45,2.92, height 6.25
FP-GRM188-0_1-e0_2_0_55-IPC_A [mm]
  rect 1.208x1.012 smd paste+0 mask+0: 1(-0.802,0) 2(0.802,0)
  silkscreen extent -1.41,-0.91 1.41,0.91, body extent -1.91,-1.01 1.91,1.01, height 0.25
FP-MCR10-IPC_C [mm]
  rect 0.858x1.262 smd paste+0 mask+0: 1(-0.777,0) 2(0.777,0)
  silkscreen extent -1.21,-1.07 1.21,1.07, body extent -1.31,-0.77 1.31,0.77, height 0.25
FP-PG-TO252-3-MFG [mm]
  rect 1.5x2.5 smd paste+0 mask+0: 1(-2.3,-4.575) 3(2.3,-4.575)
  rect 7x7 smd paste+0 mask+0: 4(0,2.325)
  silkscreen extent -3.37,-2.28 3.37,-1.55, body extent -3.6,-5.92 3.6,5.92, height 0.25
FP-RC2012-IPC_A [mm]
  rect 1.305x1.508 smd paste+0 mask+0: 1(-1.001,0) 2(1.001,0)
  silkscreen extent -1.65,-1.15 1.65,1.15, body extent -2.15,-1.25 2.15,1.25, height 0.25
FP-RH-8-1-IPC_C [mm]
  rect 1.257x0.436 smd paste+0 mask+0: 1(-2.051,0.975)
  rrect100% 1.257x0.436 smd paste+0 mask+0: 2(-2.051,0.325) 3(-2.051,-0.325) 4(-2.051,-0.975) 5(2.051,-0.975) 6(2.051,-0.325) 7(2.051,0.325) 8(2.051,0.975)
  rect 1.83x2.26 smd paste-1000 mask+0: 9(0,0)
  silkscreen extent -3.38,-1.6 1.5,1.6, body extent -2.46,-1.5 2.46,1.5, height 1.1
FP-RMCF0805-IPC_C [mm]
  rect 0.955x1.262 smd paste+0 mask+0: 1(-0.776,0) 2(0.776,0)
  silkscreen extent -1.25,-1.07 1.25,1.07, body extent -1.35,-0.77 1.35,0.77, height 0.25
FP-RT0805-MFG [mm]
  rect 0.9x1.2 smd paste+0 mask+0: 1(-1.05,0) 2(1.05,0)
  silkscreen extent -0.22,-0.67 0.22,0.67, body extent -1.6,-0.77 1.6,0.77, height 0.25
FP-SC-MFG [mm]
  rect 2.8x1.6 smd paste+0 mask+0: 1(-2.15,0) 2(2.15,0)
  silkscreen extent -4.22,-2.75 2.75,2.75, body extent -3,-2.65 3,2.65, height 5.8
FP-SGV8X10_5-MFG [mm]
  rect 4.1x2.2 smd paste+0 mask+0: 1(-3.55,0) 2(3.55,0)
  silkscreen extent -6.35,-4.25 4.25,4.25, body extent -5.85,-4.5 5.85,4.5, height 0.25
FP-SOD123F_Type_B-MFG [mm]
  rect 1x1.5 smd paste+0 mask+0: 1(-1.45,0) 2(1.45,0)
  silkscreen extent -2.77,-0.95 0.38,0.95, body extent -2.05,-1.05 2.05,1.05, height 0.25
FP-TO-252-2_v2-MFG [mm]
  rect 1.3x2.4 smd paste+0 mask+0: 1(-2.39,-5.908) 2(2.39,-5.908)
  rect 6.2x6.5 smd paste+0 mask+0: 3(0,2.042)
  silkscreen extent -3.67,-3.12 3.67,3.12, body extent -3.77,-7.21 3.77,5.39, height 0.25
INF-PG-TO252-3-11_A_L [mm] "DPAK, 3-Leads, Body 6.57x6.1mm, Pitch 2.29mm, IPC High Density"
  rect 1.7x0.95 smd: 1(-4.6,2.29) 3(-4.6,-2.29)
  rect 6.8x5.5 smd: 2(2,0)
  silkscreen extent -4.72,-3.35 -1.8,3.44, body extent -2.2,-3.37 4.02,3.37, height 2.41
ONSC-SOD-523-2-502-01_V [mm] "SOD, 2-Leads, Body 1.2x0.8mm"
  rect 0.48x0.4 smd: 1(-0.66,0) 2(0.66,0)
  silkscreen extent -0.75,-0.4 0.07,0.65, body extent -0.6,-0.4 0.6,0.4, height 0.7
RESC2013X50X30LL20T20 [mm] "Chip Resistor, 2-Leads, Body 2.00x1.25mm, IPC High Density"
  rect 0.85x1.35 smd: 1(-0.825,0) 2(0.825,0)
  silkscreen extent -0.1,-0.58 0.1,0.58, body extent -1.1,-0.72 1.1,0.72, height 0.5
RESC2013X60X35ML10T20 [mm] "Chip Resistor, 2-Leads, Body 2.1x1.35mm, IPC Low Density"
  rect 1.2x1.45 smd: 1(-1,0) 2(1,0)
  silkscreen extent -0.1,-0.62 0.1,0.62, body extent -1.05,-0.68 1.05,0.67, height 0.6
RESC2013X60X40LL20T25 [mm] "Chip Resistor, 2-Leads, Body 2.00x1.25mm, IPC High Density"
  rect 1x1.35 smd: 1(-0.75,0) 2(0.75,0)
  body extent -1.1,-0.72 1.1,0.72, height 0.6
RESC2013X60X40ML20T25 [mm] "Chip Resistor, 2-Leads, Body 2.00x1.25mm, IPC Low Density"
  rect 1.4x1.55 smd: 1(-0.95,0) 2(0.95,0)
  body extent -1.1,-0.72 1.1,0.72, height 0.6
RESC2013X70X40LL20T20 [mm] "Chip Resistor, 2-Leads, Body 2.00x1.25mm, IPC High Density"
  rect 0.95x1.35 smd: 1(-0.775,0) 2(0.775,0)
  body extent -1.1,-0.72 1.1,0.72, height 0.7
RESC2013X70X40ML20T20 [mm] "Chip Resistor, 2-Leads, Body 2.00x1.25mm, IPC Low Density"
  rect 1.35x1.55 smd: 1(-0.975,0) 2(0.975,0)
  body extent -1.1,-0.72 1.1,0.72, height 0.7
STM-LQFP176_N [mm] "Thin QFP, 176-Leads, Body 24x24mm, Pitch 0.5mm, IPC Medium Density"
  oval 1.8x0.3 smd: 1(-12.55,10.75) 2(-12.55,10.25) 3(-12.55,9.75) 4(-12.55,9.25) 5(-12.55,8.75) 6(-12.55,8.25) 7(-12.55,7.75) 8(-12.55,7.25) 9(-12.55,6.75) 10(-12.55,6.25) 11(-12.55,5.75) 12(-12.55,5.25) 13(-12.55,4.75) 14(-12.55,4.25) 15(-12.55,3.75) 16(-12.55,3.25) 17(-12.55,2.75) 18(-12.55,2.25) 19(-12.55,1.75) 20(-12.55,1.25) 21(-12.55,0.75) 22(-12.55,0.25) 23(-12.55,-0.25) 24(-12.55,-0.75) 25(-12.55,-1.25) 26(-12.55,-1.75) 27(-12.55,-2.25) 28(-12.55,-2.75) 29(-12.55,-3.25) 30(-12.55,-3.75) 31(-12.55,-4.25) 32(-12.55,-4.75) 33(-12.55,-5.25) 34(-12.55,-5.75) 35(-12.55,-6.25) 36(-12.55,-6.75) 37(-12.55,-7.25) 38(-12.55,-7.75) 39(-12.55,-8.25) 40(-12.55,-8.75) 41(-12.55,-9.25) 42(-12.55,-9.75) 43(-12.55,-10.25) 44(-12.55,-10.75) 89(12.55,-10.75) 90(12.55,-10.25) 91(12.55,-9.75) 92(12.55,-9.25) 93(12.55,-8.75) 94(12.55,-8.25) 95(12.55,-7.75) 96(12.55,-7.25) 97(12.55,-6.75) 98(12.55,-6.25) 99(12.55,-5.75) 100(12.55,-5.25) 101(12.55,-4.75) 102(12.55,-4.25) 103(12.55,-3.75) 104(12.55,-3.25) 105(12.55,-2.75) 106(12.55,-2.25) 107(12.55,-1.75) 108(12.55,-1.25) 109(12.55,-0.75) 110(12.55,-0.25) 111(12.55,0.25) 112(12.55,0.75) 113(12.55,1.25) 114(12.55,1.75) 115(12.55,2.25) 116(12.55,2.75) 117(12.55,3.25) 118(12.55,3.75) 119(12.55,4.25) 120(12.55,4.75) 121(12.55,5.25) 122(12.55,5.75) 123(12.55,6.25) 124(12.55,6.75) 125(12.55,7.25) 126(12.55,7.75) 127(12.55,8.25) 128(12.55,8.75) 129(12.55,9.25) 130(12.55,9.75) 131(12.55,10.25) 132(12.55,10.75)
  oval 0.3x1.8 smd: 45(-10.75,-12.55) 46(-10.25,-12.55) 47(-9.75,-12.55) 48(-9.25,-12.55) 49(-8.75,-12.55) 50(-8.25,-12.55) 51(-7.75,-12.55) 52(-7.25,-12.55) 53(-6.75,-12.55) 54(-6.25,-12.55) 55(-5.75,-12.55) 56(-5.25,-12.55) 57(-4.75,-12.55) 58(-4.25,-12.55) 59(-3.75,-12.55) 60(-3.25,-12.55) 61(-2.75,-12.55) 62(-2.25,-12.55) 63(-1.75,-12.55) 64(-1.25,-12.55) 65(-0.75,-12.55) 66(-0.25,-12.55) 67(0.25,-12.55) 68(0.75,-12.55) 69(1.25,-12.55) 70(1.75,-12.55) 71(2.25,-12.55) 72(2.75,-12.55) 73(3.25,-12.55) 74(3.75,-12.55) 75(4.25,-12.55) 76(4.75,-12.55) 77(5.25,-12.55) 78(5.75,-12.55) 79(6.25,-12.55) 80(6.75,-12.55) 81(7.25,-12.55) 82(7.75,-12.55) 83(8.25,-12.55) 84(8.75,-12.55) 85(9.25,-12.55) 86(9.75,-12.55) 87(10.25,-12.55) 88(10.75,-12.55) 133(10.75,12.55) 134(10.25,12.55) 135(9.75,12.55) 136(9.25,12.55) 137(8.75,12.55) 138(8.25,12.55) 139(7.75,12.55) 140(7.25,12.55) 141(6.75,12.55) 142(6.25,12.55) 143(5.75,12.55) 144(5.25,12.55) 145(4.75,12.55) 146(4.25,12.55) 147(3.75,12.55) 148(3.25,12.55) 149(2.75,12.55) 150(2.25,12.55) 151(1.75,12.55) 152(1.25,12.55) 153(0.75,12.55) 154(0.25,12.55) 155(-0.25,12.55) 156(-0.75,12.55) 157(-1.25,12.55) 158(-1.75,12.55) 159(-2.25,12.55) 160(-2.75,12.55) 161(-3.25,12.55) 162(-3.75,12.55) 163(-4.25,12.55) 164(-4.75,12.55) 165(-5.25,12.55) 166(-5.75,12.55) 167(-6.25,12.55) 168(-6.75,12.55) 169(-7.25,12.55) 170(-7.75,12.55) 171(-8.25,12.55) 172(-8.75,12.55) 173(-9.25,12.55) 174(-9.75,12.55) 175(-10.25,12.55) 176(-10.75,12.55)
  silkscreen extent -12.68,-11.25 11.25,11.57, body extent -12,-12 12,12, height 1.6
T_DIP09_74087_21X21_MYR [mil]
  round 48 / inner round 60 / far side round 48 hole 28 paste-99999 mask+0: 1(0,0) 2(0,-150) 4(0,-450) 5(0,-600) 6(600,-600) 7(600,-450) 8(600,-300) 9(600,-150) 10(600,0)
  silkscreen extent -119,-719 719,118
Vishay_CRCW0805-e3_MFG [mm]
  rect 0.95x1.45 smd paste+0 mask+0: 1(-0.975,0) 2(0.975,0)
  silkscreen extent -0.13,-0.7 0.13,0.7, body extent -1.55,-0.82 1.55,0.82, height 0.25
WL-SMCW_0805_150080xx75000 [mm] "SMD Mono-color Chip LED, body 2.0x1.25mm"
  rect 1.1x1.3 smd: 1(-1.05,0) 2(1.05,0)
  silkscreen extent -2,-0.6 -1.8,0.6, body extent -1,-0.63 1,0.62, height 0.7

## Part data
C1 C7: library part CMP-1662-00015-2, "Chip Capacitor, 4.7 uF, +/- 10%, 16 V, -55 to 85 degC, 0805 (2012 Metric), RoHS, Tape and Reel", Capacitance="4.7 uF", Case Code (Imperial)=0805, Case Code (Metric)=2012, Max Operating Temperature="85 degC", Min Operating Temperature="-55 degC", Package Quantity=3000, Tolerance=10%, Type (Capacitors)=X5R, Voltage Rating="16 V", Case\/Package=0805, ComponentLink1Description="Manufacturer URL", ComponentLink1URL=http://www.murata.com/, ComponentLink2Description=Datasheet, ComponentLink2URL=http://search.murata.co.jp/Ceramy/image/img/A01X/G101/ENG/GRM21BR61C475KA88-01.pdf, DatasheetVersion=03/2016, Height="1.25 mm", Length="2 mm", Mount="Surface Mount", Mounting Technology="Surface Mount", PackageDescription="2-Pin Surface Mount Device, Body 2 x 1.25 mm", PackageReference=0805, Packaging="Tape and Reel", PartNumber=GRM21BR61C475KA88L, Pins=2, Radiation Hardening=No, REACH SVHC="No SVHC", RoHSCompliant=true, Voltage Rating (DC)="16 V", Width="1.25 mm"
C2 C8: library part CMP-2007-03262-2, "CAP CER 0.22UF 100V 10% X7R 0805", Capacitance="0.22 μF", Manufacturer=KEMET, Package=C0805C-DN, Temperature="-55°C to +125°C", Temperature Characteristic=X7R, Temperature Coefficient=30ppm/°C, Temperature Range High=+125°C, Temperature Range Low=-55°C, Tolerance=0.1, Voltage Rating="100 V", Automotive=No, Category=Cap, ComponentLink2Description=Datasheet, ComponentLink2URL=https://content.kemet.com/datasheets/KEM_C1003_C0G_SMD.pdf, Device Class L1="Passive Components", Device Class L2=Capacitors, Device Class L3="Ceramic Capacitors", Digikey Description="CAP CER 0.22UF 100V 10% X7R 0805", Height=0.88mm, Ipc Land Pattern Name=CAPC200125X78, Lead Free=Yes, Manufacturer Part Number=C0805C224K1RACTU, Material=Ceramic, Mouser Description="0805 C 220nF Ceramic Multilayer Capacitor, 100 V, +125degC, X7R Dielec, +/-10%", Octopart=https://octopart.com/c0805c224k1ractu-kemet-12818106, RoHS=TRUE
C3 C9: library part CMP-00030-39758189-1, "BFC233820225 Film Capacitor, Polypropylene, 800V, 20% +Tol, 20% -Tol, 0.22uF, Through Hole Mount", Capacitance=2.2µF, Case/Package=Radial, Dielectric=PP, Insulation Resistance=11GΩ, Max Operating Temperature=110°C, Min Operating Temperature=-55°C, Tolerance=20%, Voltage Rating=630V, Voltage Rating (AC)=310V, Contact Plating=Tin, Depth=15mm, Diameter=18mm, Dielectric Material=PP, Height=28mm, Height - Seated (Max)=24.9936mm, Lead Diameter=800µm, Lead Free="Lead Free", Lead Pitch=27.5mm, Length=31.5mm, Mount="Through Hole", NexarPartId=39758189, Number of Pins=2, Packaging=Bulk, Radiation Hardening=No, REACH SVHC=Unknown, RoHS=Compliant, Schedule B="8532250020, 8532250020", Termination=Radial, Voltage Rating (DC)=630V, Width=15.0114mm
C4 C10: library part CMP-2007-03234-1, Manufacturer=Kemet, Part Number=C0805C105K3RACTU
C5 C11: library part CMP-2006-02595-1, Manufacturer=Murata, Part Number=GRM1885C1H101JA01D
C6 C12: library part CMP-2007-00259-2, "CAP CER 10000PF 200V X7R 0805", Capacitance="10,000 pF", Manufacturer=KEMET, Package=C0805C-DN, Temperature="-55°C to +125°C", Temperature Characteristic=X7R, Temperature Coefficient=30ppm/°C, Temperature Range High=+125°C, Temperature Range Low=-55°C, Tolerance=0.1, Voltage Rating="200 V", Automotive=No, Category=Cap, ComponentLink2Description=Datasheet, ComponentLink2URL=https://content.kemet.com/datasheets/KEM_C1003_C0G_SMD.pdf, Device Class L1="Passive Components", Device Class L2=Capacitors, Device Class L3="Ceramic Capacitors", Digikey Description="CAP CER 10000PF 200V X7R 0805", Height=0.88mm, Ipc Land Pattern Name=CAPC200125X78, Lead Free=Yes, Manufacturer Part Number=C0805C103K2RACTU, Material=Ceramic, Mouser Description="KEMET - C0805C103K2RACTU - CAP, MLCC, X7R, 10NF, 200V, 0805", Octopart=https://octopart.com/c0805c103k2ractu-kemet-9138347, RoHS=TRUE
C13 C14 C26 C27 C30 C32: library part CMP-05427-000087-1, "CAP ALUM 10UF 20% 35V SMD", Capacitance=10uF, Case/Package=Radial, Leakage Current=3uA, Max Operating Temperature=85°C, Min Operating Temperature=-40°C, Package Quantity=1, Ripple Current=30mA, Tolerance=20%, Voltage=35V, Construction=Cylindrical, Contact Plating=Tin, Diameter=5mm, Height=5.4mm, Height - Seated (Max)=0.213inch, Lead Length=2.2mm, Lead Pitch=1.5mm, Length=5.5mm, Life (Hours)=2000Hour, Mount="Surface Mount", Number of Pins=2, Packaging="Tape and Reel", Radiation Hardening=No, REACH SVHC="No SVHC", Ripple Current (AC)=30mA, RoHS Compliant=Yes, Series=S, Termination=SMD/SMT, Voltage Rating=35V, Voltage Rating (DC)=35V, Width=5.3mm
C15 C16 C17 C28 C29 C31 C33: library part CMP-2007-04640-2, "CAP CER 0.1UF 50V Y5V 0805", Capacitance=100nF, Case Code (Imperial)=0805, Case Code (Metric)=2012, Dielectric=Y5V, Max Operating Temperature=85°C, Min Operating Temperature=-30°C, Package Quantity=1, Tolerance=80%, Voltage=50V, Case/Package=0805, Construction=Flat, Depth=1.25mm, Height=0.93mm, Lead Free="Lead Free", Length=2.01mm, Mount="Surface Mount", Number of Pins=2, Packaging="Tape and Reel", Radiation Hardening=No, REACH SVHC="No SVHC", RoHS Compliant=Yes, Series=-, Termination=SMD/SMT, Thickness=0.028inch, Voltage Rating=50V, Voltage Rating (DC)=50V, Width=0.049inch
C18 C22: library part CMP-03020-022490-1, "C0805 8,200 pF C0G 30ppm/°C 2.00% 200 V", Capacitance="8,200 pF", Manufacturer=KEMET, Package=C0805C-DN, Temperature="-55°C to +125°C", Temperature Characteristic=C0G, Temperature Coefficient=30ppm/°C, Temperature Range High=+125°C, Temperature Range Low=-55°C, Tolerance=0.02, Voltage Rating="200 V", Automotive=No, Category=Cap, ComponentLink2Description=Datasheet, ComponentLink2URL=https://content.kemet.com/datasheets/KEM_C1003_C0G_SMD.pdf, Device Class L1="Passive Components", Device Class L2=Capacitors, Device Class L3="Ceramic Capacitors", Height=0.88mm, Ipc Land Pattern Name=CAPC200125X78, Lead Free=Yes, Manufacturer Part Number=C0805C822G2GACTU, Material=Ceramic, Mouser Description="Multilayer Ceramic Capacitors MLCC - SMD/SMT 200volts 8.2nF 2% C0G", Octopart=https://octopart.com/c0805c822g2gactu-kemet-88375202, RoHS=TRUE
C19 C20 C23 C24: library part CMP-2006-02792-2, "Chip Multilayer Ceramic Capacitors for General Purpose, 0603, 10uF, X5R, 15%, 20%, 6.3V", Capacitance=10uF, Case Code (Imperial)=0603, Case Code (Metric)=1608, Dielectric=X5R, Max Operating Temperature=85°C, Min Operating Temperature=-55°C, Package Quantity=4000, Tolerance=20%, Voltage=6.3V, Case/Package=0603, Depth=0.8mm, Height=0.8mm, Lead Free="Lead Free", Length=1.6mm, Material=Ceramic, Mount="Surface Mount", Packaging="Tape and Reel", Radiation Hardening=No, REACH SVHC="No SVHC", Termination=SMD/SMT, Thickness=0.035inch, Voltage Rating=6.3V, Voltage Rating (DC)=6.3V, Width=0.031inch
C21 C25: library part CMP-2007-04538-1, Manufacturer="AVX Interconnect / Elco", Part Number=08051A220J4T2A
C34 C35 C36 C37: library part CMP-35376-000016-1, "CAP ALUM 100UF 20% 50V SMD", Capacitance=100uF, Case/Package=Radial, Leakage Current=3uA, Max Operating Temperature=105°C, Min Operating Temperature=-55°C, Package Quantity=500, Ripple Current=230mA, Tolerance=20%, Voltage=50V, Construction=Cylindrical, Diameter=8mm, Height=10.5mm, Height - Seated (Max)=0.413inch, Lead Diameter=1.1mm, Lead Free="Lead Free", Lead Pitch=3.1mm, Life (Hours)=2000Hour, Mount="Surface Mount", Packaging="Tape and Reel", Radiation Hardening=No, RoHS Compliant=Yes, Series=SGV, Termination=SMD/SMT, Voltage Rating=50V
D1 D6: library part CMP-240925-000041-3, "DIODE SCHOTTKY 600V 3A TO252-2", Average Rectified Current=11A, Case/Package=TO-252, Forward Current=3A, Forward Voltage=1.7V, Max Forward Surge Current (Ifsm)=100A, Max Operating Temperature=175°C, Max Power Dissipation=53W, Max Repetitive Reverse Voltage (Vrrm)=600V, Max Reverse Current=100uA, Max Reverse Leakage Current=50uA, Min Operating Temperature=-55°C, Package Quantity=75, Element Configuration=Single, Height=2.388mm, Length=7.34mm, Max Reverse Voltage (DC)=600V, Max Surge Current=100A, Mount="Surface Mount", Number of Pins=2, Packaging=Rail/Tube, Peak Non-Repetitive Surge Current=100A, Radiation Hardening=No, Reverse Recovery Time=0ns, RoHS Compliant=Yes, Series=Z-Rec®, Termination="Through Hole", Width=7.518mm
D2 D3 D4 D5 D7 D8 D9 D10: library part CMP-2000-05114-2, "DIODE SCHOTTKY 40V 500MA SOD123", Average Rectified Current=500mA, Current Rating=500A, Forward Voltage=620mV, Max Forward Surge Current (Ifsm)=5.5A, Max Operating Temperature=125°C, Max Repetitive Reverse Voltage (Vrrm)=40V, Max Reverse Leakage Current=20uA, Min Operating Temperature=-65°C, Package Quantity=3000, Power Dissipation=400mW, Contact Plating=Tin, Element Configuration=Single, Forward Current=500mA, Height=1.03mm, Lead Free="Lead Free", Length=2.7mm, Max Reverse Voltage (DC)=40V, Max Surge Current=5.5A, Mount="Surface Mount", Number of Pins=2, Output Current=500mA, Packaging="Tape and Reel", Peak Non-Repetitive Surge Current=5.5A, Peak Reverse Current=20uA, Polarity=Standard, Radiation Hardening=No, REACH SVHC="No SVHC", Voltage Rating (DC)=40V, Weight=0.03g, Width=1.6mm
D13 D14 D16 D17 D18 D19 D21 D22: library part CMP-12791-000028-1, "DIODE SBR 40V 1A SOD123F", Capacitance=30pF, Forward Current=1A, Manufacturer="Diodes Inc.", Max Junction Temp=+125°C, Max Repetitive Reverse Voltage=40V, Max Surge Forward Current=30A, Package="SOD123F (Type B)", Peak Reverse Current=0.5mA, Temperature="-55°C to +125°C", Temperature Range Low=-55°C, Automotive=No, Category=Diode, ComponentLink2Description=Datasheet, ComponentLink2URL=https://www.diodes.com/assets/Datasheets/1N5819HW1.pdf, Device Class L1="Discrete Semiconductors", Device Class L2=Diodes, Device Class L3="Rectifier Diodes", Digikey Description="DIODE SBR 40V 1A SOD123F", Footprint Url=https://www.diodes.com/assets/Package-Files/SOD123F%20(Type%20B).pdf, Height=1.15mm, Ipc Land Pattern Name=SOD350180X98-2, Lead Free=Yes, Manufacturer Part Number=1N5819HW1-7-F, Mouser Description="Schottky Diodes & Rectifiers 1A SBR 40Vrrm 0.51Vf 0.5mA 28Vrms", Octopart=https://octopart.com/1n5819hw1-7-f-diodes+inc.-67250096, Reverse Voltage=40V, RoHS=TRUE, Temperature Range High=+125°C
D15 D20: library part CMP-1060-00754-1, "Zener Voltage Regulator, 500 mW, 2-Pin SOD-523, Pb-Free, Tape and Reel", Manufacturer="On Semiconductor", ComponentLink1Description="Manufacturer URL", ComponentLink1URL=http://www.onsemi.com/, ComponentLink2Description=Datasheet, ComponentLink2URL=http://www.onsemi.cn/pub_link/Collateral/MM5Z2V4ST1-D.PDF, ComponentLink3Description="Package Specification", ComponentLink3URL=http://www.onsemi.com/pub_link/Collateral/502-01.PDF, DatasheetVersion="Rev. 9", Mounting Technology="Surface Mount", P Max (W)=0.5, PackageDescription="2-Pin SOD, Body 1.2 x 0.8 mm", PackageReference=SOD-523-2-502-01, PackageVersion="Rev. E, 09/2010", Packing="Tape and Reel", PartNumber=MM5Z2V4ST1G, RoHS=Pb-Free
J1: library part CMP-02766-001412-1, "CONN HEADER SMD 14POS 1.27MM", Housing Color=Black, Max Operating Temperature=125°C, Min Operating Temperature=-55°C, Contact Material=Bronze, Contact Plating=Gold, Depth=5.84mm, Gender=Male, Housing Material=Polymer, Lead Free="Lead Free", Length=8.89mm, Number of Contacts=14, Number of Rows=2, Orientation=Straight, Packaging=Rail/Tube, Pitch=1.27mm, Radiation Hardening=No, RoHS Compliant=Yes, Termination=Solder
J2 J3 J4 J5: library part CMP-00257-12872391-1, "38969-0002 12.70mm Pitch, Single Row Tri-Barrier Terminal Strip, without Mounting Ends, 2 Circuits", Current Rating=50A, Manufacturer Lifecycle Status=ACTIVE, Max Operating Temperature=120°C, Max Voltage Rating (AC)=600V, Min Operating Temperature=-40°C, Connector Type="Terminal Block", Contact Material=Brass, Contact Plating=Tin, Country of Origin=US, Lifecycle Status=Production, Mount="Through Hole", NexarPartId=12872391, Number of Circuits=2, Number of Contacts=2, Number of Positions=2, Number of Rows=1, Orientation=Vertical, Pitch=12.7mm, REACH SVHC=Unknown, RoHS=Compliant, Termination=Screw, Voltage Rating=600V, Wire Gauge (Max)=8AWG, Wire Gauge (Min)=20AWG, Wire/Cable Gauge=18AWG
LED1 LED2: library part CMP-1426-00010-4, "Led, Red, 630 Nm, 1.9 V, 30 Ma, 60 Mcd Rohs Compliant: Yes", Case Code (Imperial)=0805, Case Code (Metric)=2012, Color=Red, Forward Current=100mA, Forward Voltage=1.9V, Max Junction Temperature (Tj)=95°C, Max Operating Temperature=85°C, Max Reverse Voltage (DC)=5V, Min Operating Temperature=-40°C, Power Dissipation=72mW, Test Current=20mA, Case/Package=0805, Dominant Wavelength=630nm, Height=700µm, Length=2mm, Lens Style="Clear, Rectangular", Luminous Intensity=60mcd, Mount="Surface Mount", Packaging="Tape and Reel", Peak Wavelength=645nm, REACH SVHC=Unknown, Reverse Voltage=5V, RoHS=Compliant, Viewing Angle=140°, Wavelength=630nm, Width=1.25mm
Q1 Q3: library part CMP-1091-00172-1, "N-Channel OptiMOS 3 Power-Transistor, 60 V VDS, 90 A ID, -55 to 175 degC, PG-TO252-3-11, Reel, Green", Manufacturer=Infineon, ComponentLink1Description="Manufacturer URL", ComponentLink1URL=http://www.infineon.com/, ComponentLink2Description=Datasheet, ComponentLink2URL=http://www.infineon.com/dgdl/IPD035N06L3_Rev2.3.pdf?folderId=db3a304313b8b5a60113cee8763b02d7&fileId=db3a30431b3e89eb011b4558ed7f7d14, ComponentLink3Description="Package Specification", ComponentLink3URL=http://www.infineon.com/dgdl/IPD160N04L_rev1.0.pdf?folderId=db3a3043163797a6011643468e7505a4&fileId=db3a3043163797a60116436401cf05cf, DatasheetVersion="Rev. 2.3", Green=TRUE, Halogen-free=TRUE, ID (max)="90Â A", IDpuls (max)="360Â A", Mounting Technology="Surface Mount", PackageDescription="3-Pin Plastic (Green) Transistor Single Outline Package, 6.57 x 6.1 mm Body, 2.29 mm Pitch", PackageReference=PG-TO252-3-11, PackageVersion="Rev. 02, 03/2007", Packing=Reel, PartNumber="IPD035N06L3 G", Polarity=N, Ptot (max)="167Â W", QG="59Â nC", RDS (on) (max)="3.5Â mOhm", RDS (on) (max) (@4.5V)="5.5Â mOhm", Rth="0.9Â K/W", RthJA (max)="62 K/W", RthJC (max)="0.9Â K/W", VDS (max)="60Â V", VGS(th) (max)="2.2Â V", VGS(th) (min)="1.2Â V"
Q2 Q4: library part CMP-32901-000143-1, "MOSFET N-CH 30V 161A DPAK", Continuous Drain Current=161A, Drain To Source Breakdown Voltage=30V, Drain To Source Resistance=3.2mΩ, Gate To Source Voltage=20V, Input Capacitace At Vds="4380pF @ 15V", Manufacturer=Infineon, Manufacturer Part Number=IRLR7843TRPBF, Max Forward Diode Voltage=1V, Max Junction Temp=+175°C, Package=PG-TO252-3, Power Dissipation=140W, Pulse Drain Current=620A, Temperature="-55°C to +175°C", Temperature Range Low=-55°C, Automotive=No, Category=Trans, ComponentLink2Description=Datasheet, ComponentLink2URL=https://www.infineon.com/dgdl/irlr7843pbf.pdf?fileId=5546d462533600a40153566de53526d8, Depletion Mode=False, Device Class L1="Discrete Semiconductors", Device Class L2=Transistors, Device Class L3=MOSFETs, Digikey Description="MOSFET N-CH 30V 161A DPAK", Drain To Source Voltage=30V, Footprint Url=https://www.infineon.com/cms/en/product/packages/PG-TO252/PG-TO252-3-901/, Gate Charge At Vgs="34nC @ 4.5V", Height=2.52mm, Lead Free=Yes, Number Of Channels=1, Number Of N Channels=1, Octopart=https://octopart.com/irlr7843trpbf-infineon-65875062, Reverse Recovery Charge=36nC, Reverse Recovery Time=39ns, RoHS=TRUE, Rthja Max=50°C/W, Temperature Range High=+175°C, Threshold Vgs Max=2.3V, Threshold Vgs Min=1.4V, Turn Off Delay Time=34ns, Turn On Delay Time=25ns
R1 R9: library part CMP-2001-03930-2, "RES Thick Film, 470kΩ, 1%, 0.125W, 100ppm/°C, 0805", Case Code (Imperial)=0805, Case Code (Metric)=2012, Max Operating Temperature=155°C, Max Power Dissipation=125mW, Min Operating Temperature=-55°C, Package Quantity=10, Resistance=470kR, Temperature Coefficient=100ppm/°C, Tolerance=1%, Voltage Rating=150V, Case/Package=0805, Composition="Thick Film", Contact Plating=Tin, Depth=1.25mm, Features="Automotive AEC-Q200", Height=0.45mm, Lead Free="Lead Free", Length=2mm, Military Standard=Not, Number of Pins=2, Number of Terminations=2, Packaging="Tape and Reel", Power Rating=125mW, Radiation Hardening=No, Termination=SMD/SMT, Voltage Rating (DC)=150V, Weight=0.000194oz, Width=0.049inch
R2 R6 R10 R14: library part CMP-2001-04129-1, Manufacturer="Vishay Dale", Part Number=CRCW0805820KFKEA
R3 R11: library part CMP-2100-03615-2, "RES Thick Film, 4.7kΩ, 1%, 0.125W, 100ppm/°C, 0805", Case Code (Imperial)=0805, Case Code (Metric)=2012, Max Operating Temperature=155°C, Max Power Dissipation=125mW, Min Operating Temperature=-55°C, Package Quantity=10, Resistance=4.7kR, Temperature Coefficient=100ppm/°C, Tolerance=1%, Voltage Rating=150V, Case/Package=0805, Composition="Thick Film", Contact Plating=Tin, Depth=1.25mm, Features="Automotive AEC-Q200", Height=0.45mm, Lead Free="Lead Free", Length=2mm, Military Standard=Not, Number of Terminations=2, Packaging="Tape and Reel", Power Rating=125mW, Radiation Hardening=No, Termination=SMD/SMT, Voltage Rating (DC)=150V, Weight=0.000194oz, Width=1.25mm
R4 R12: library part CMP-2001-04015-2, "RES Thick Film, 56kΩ, 1%, 0.125W, 100ppm/°C, 0805", Case Code (Imperial)=0805, Case Code (Metric)=2012, Max Operating Temperature=155°C, Max Power Dissipation=125mW, Min Operating Temperature=-55°C, Package Quantity=10, Resistance=56kR, Temperature Coefficient=100ppm/°C, Tolerance=1%, Voltage Rating=150V, Case/Package=0805, Composition="Thick Film", Contact Plating=Tin, Depth=1.25mm, Features="Automotive AEC-Q200", Height=0.45mm, Lead Free="Lead Free", Length=2mm, Military Standard=Not, Mount="Surface Mount", Number of Pins=2, Number of Terminations=2, Packaging="Tape and Reel", Power Rating=125mW, Radiation Hardening=No, Termination=SMD/SMT, Voltage Rating (DC)=150V, Weight=0.000194oz, Width=1.25mm
R5 R13: library part CMP-26527-004567-1, "Foil on Ceramic Current Sensing Chip Resistor 15mΩ ±1% 2W 2512 AEC Qualified", Case/Package=2512, Max Operating Temperature=170°C, Max Power Dissipation=2W, Min Operating Temperature=-55°C, Package Quantity=2000, Resistance=15mR, Resistor Type="Metal Foil", Temperature Coefficient=50ppm/°C, Tolerance=1%, Contact Plating=Tin, Features="Moisture Resistant", Height=0.047inch, Lead Free="Lead Free", Length=0.252inch, Mount="Surface Mount", Number of Terminations=2, Packaging="Tape and Reel", Power Rating=2W, Radiation Hardening=No, RoHS Compliant=Yes, Series=CSRF, Width=0.126inch
R7 R15: library part CMP-2001-00514-1, Manufacturer=Panasonic, Part Number=ERJ6ENF1203V
R8 R16: library part CMP-2001-00606-1, Manufacturer=Panasonic, Part Number=ERA6AEB183V